# EAGLE board 13654-CSS811_CO2_TVOC_Breakout-panel.10 (EAGLE 7.5.0), part 1 of 3
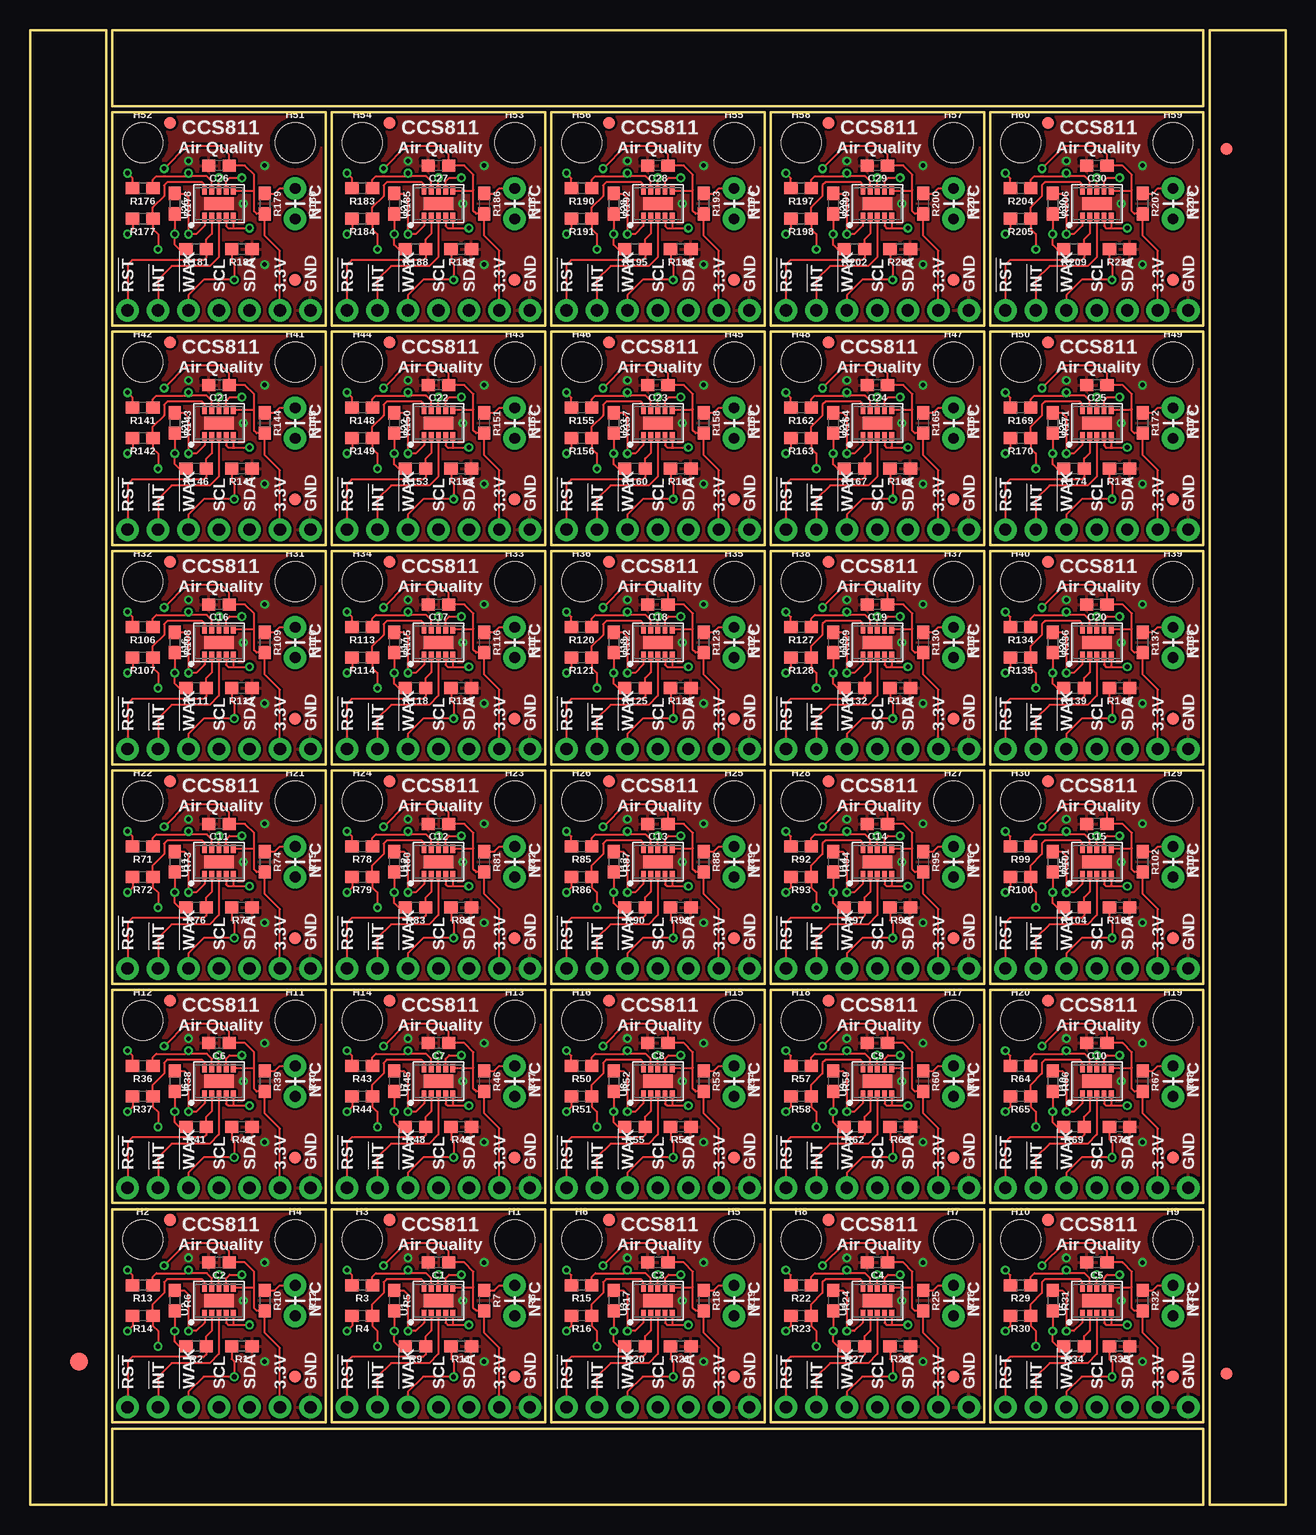
[diagram p0: board, top side]
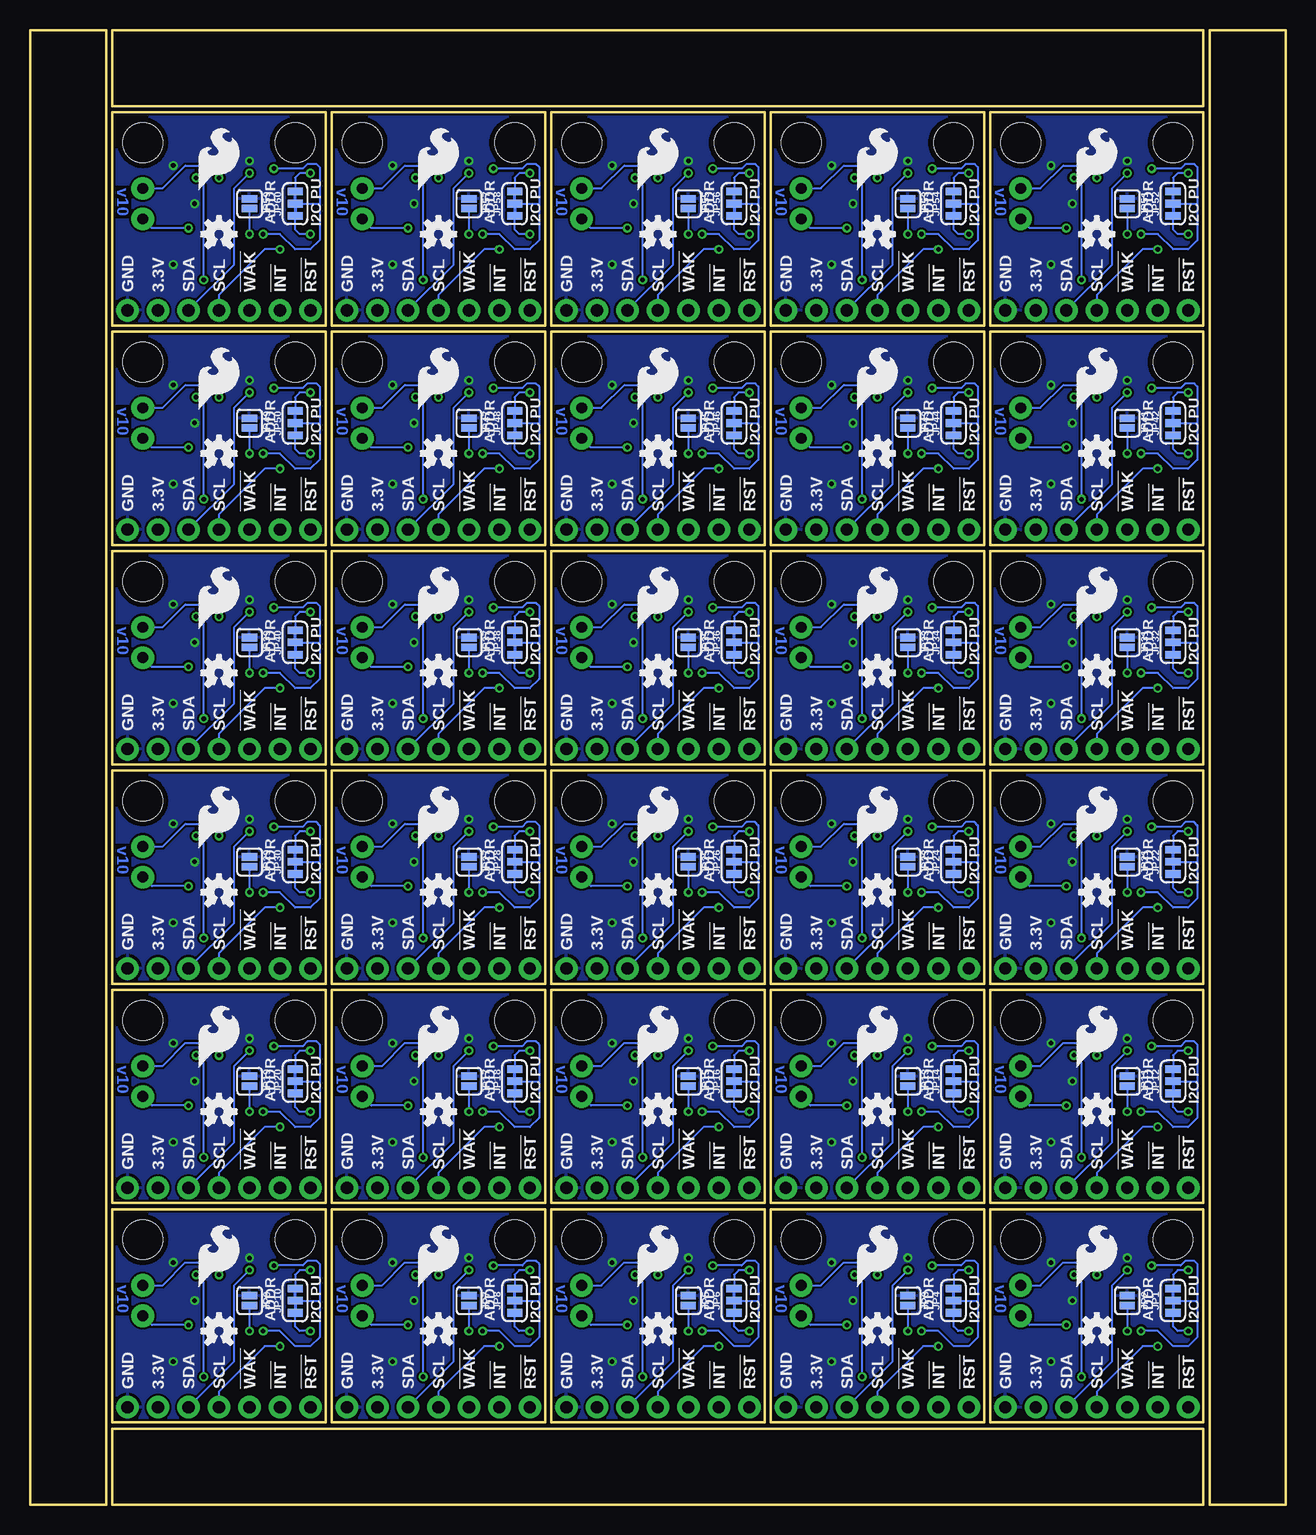
[diagram p1: board, bottom side, seen from below]

Size 104.65 x 122.94 mm. Coordinates in mm from the lower left corner, seen from the top.
Outline: 6.35,75.44 6.35,0 0,0 0,25.91
Outline: 0,23.37 0,122.94 6.35,122.94 6.35,72.9
Outline: 79.25,0 6.86,0 6.86,6.35 29.72,6.35
Outline: 27.18,6.35 97.79,6.35 97.79,0 76.71,0
Outline: 25.4,122.94 97.79,122.94 97.79,116.59 74.93,116.59
Outline: 77.47,116.59 6.86,116.59 6.86,122.94 27.94,122.94
Outline: 98.3,50.55 98.3,122.94 104.65,122.94 104.65,100.08
Outline: 104.65,102.62 104.65,0 98.3,0 98.3,53.09
Outline: 6.86,6.86 6.86,24.64 24.64,24.64 24.64,6.86 6.86,6.86
Outline: 25.15,6.86 25.15,24.64 42.93,24.64 42.93,6.86 25.15,6.86
Outline: 43.43,6.86 43.43,24.64 61.21,24.64 61.21,6.86 43.43,6.86
Outline: 61.72,6.86 61.72,24.64 79.5,24.64 79.5,6.86 61.72,6.86
Outline: 80.01,6.86 80.01,24.64 97.79,24.64 97.79,6.86 80.01,6.86
Outline: 6.86,25.15 6.86,42.93 24.64,42.93 24.64,25.15 6.86,25.15
Outline: 25.15,25.15 25.15,42.93 42.93,42.93 42.93,25.15 25.15,25.15
Outline: 43.43,25.15 43.43,42.93 61.21,42.93 61.21,25.15 43.43,25.15
Outline: 61.72,25.15 61.72,42.93 79.5,42.93 79.5,25.15 61.72,25.15
Outline: 80.01,25.15 80.01,42.93 97.79,42.93 97.79,25.15 80.01,25.15
Outline: 6.86,43.43 6.86,61.21 24.64,61.21 24.64,43.43 6.86,43.43
Outline: 25.15,43.43 25.15,61.21 42.93,61.21 42.93,43.43 25.15,43.43
Outline: 43.43,43.43 43.43,61.21 61.21,61.21 61.21,43.43 43.43,43.43
Outline: 61.72,43.43 61.72,61.21 79.5,61.21 79.5,43.43 61.72,43.43
Outline: 80.01,43.43 80.01,61.21 97.79,61.21 97.79,43.43 80.01,43.43
Outline: 6.86,61.72 6.86,79.5 24.64,79.5 24.64,61.72 6.86,61.72
Outline: 25.15,61.72 25.15,79.5 42.93,79.5 42.93,61.72 25.15,61.72
Outline: 43.43,61.72 43.43,79.5 61.21,79.5 61.21,61.72 43.43,61.72
Outline: 61.72,61.72 61.72,79.5 79.5,79.5 79.5,61.72 61.72,61.72
Outline: 80.01,61.72 80.01,79.5 97.79,79.5 97.79,61.72 80.01,61.72
Outline: 6.86,80.01 6.86,97.79 24.64,97.79 24.64,80.01 6.86,80.01
Outline: 25.15,80.01 25.15,97.79 42.93,97.79 42.93,80.01 25.15,80.01
Outline: 43.43,80.01 43.43,97.79 61.21,97.79 61.21,80.01 43.43,80.01
Outline: 61.72,80.01 61.72,97.79 79.5,97.79 79.5,80.01 61.72,80.01
Outline: 80.01,80.01 80.01,97.79 97.79,97.79 97.79,80.01 80.01,80.01
Outline: 6.86,98.3 6.86,116.08 24.64,116.08 24.64,98.3 6.86,98.3
Outline: 25.15,98.3 25.15,116.08 42.93,116.08 42.93,98.3 25.15,98.3
Outline: 43.43,98.3 43.43,116.08 61.21,116.08 61.21,98.3 43.43,98.3
Outline: 61.72,98.3 61.72,116.08 79.5,116.08 79.5,98.3 61.72,98.3
Outline: 80.01,98.3 80.01,116.08 97.79,116.08 97.79,98.3 80.01,98.3
Copper layers (1*16): Top 0.035mm / dielectric 1.5mm / Bottom 0.035mm
Design rules "SparkFun-2-layer-TIGHT": minimum track width 7mil, minimum drill 15mil, track to track 7mil, track to pad 7mil, pad to pad 7mil, via to via 7mil, smd to smd 7mil, copper to edge 7mil, drill to drill 7mil, minimum pad ring 7mil, minimum via ring 7mil, stop-mask expansion 4mil, vias tented up to drill 25mil, thermal gap 10mil

## Footprints (pad centres in the part's own frame; a part is rotated, then mirrored left to right if it is on the bottom)
0603 = smd 1.1 x 1: 1 -0.85,0; 2 0.85,0
FIDUCIAL-1.5X3 = smd 1.5 x 1.5: 1 0,0
FIDUCIAL-1X2 = smd 1 x 1: 1 0,0
STAND-OFF = hole 3.302: 0,0
1X04_NO_SILK = drill 1.016 pad 1.88: 1 0,0; 2 2.54,0; 3 5.08,0; 4 7.62,0
1X03_NO_SILK = drill 1.016 pad 1.88: 1 0,0; 2 2.54,0; 3 5.08,0
SMT-JUMPER_3_2-NC_TRACE_SILK = smd 0.635 x 1.27: 1 -1.016,0; 2 0,0; 3 1.016,0
SMT-JUMPER_2_NO_SILK = smd 0.635 x 1.27: 1 -0.406,0; 2 0.406,0
AXIAL-0.1 = drill 0.9 pad 1.88: P$1 -1.27,0; P$2 1.27,0
LGA10 = smd 0.7 x 0.4: 1 -1.1,1.2; 2 -1.1,0.6; 3 -1.1,0; 4 -1.1,-0.6; 5 -1.1,-1.2; 6 1.1,-1.2; 7 1.1,-0.6; 8 1.1,0; 9 1.1,0.6; 10 1.1,1.2 | smd 1.1 x 2.45: EP 0,0

## Placement (x,y rotation side)
C1  1.0uF  [0603]  34.04,20.19 180 top
C2  1.0uF  [0603]  15.75,20.19 180 top
C3  1.0uF  [0603]  52.32,20.19 180 top
C4  1.0uF  [0603]  70.61,20.19 180 top
C5  1.0uF  [0603]  88.9,20.19 180 top
C6  1.0uF  [0603]  15.75,38.48 180 top
C7  1.0uF  [0603]  34.04,38.48 180 top
C8  1.0uF  [0603]  52.32,38.48 180 top
C9  1.0uF  [0603]  70.61,38.48 180 top
C10  1.0uF  [0603]  88.9,38.48 180 top
C11  1.0uF  [0603]  15.75,56.77 180 top
C12  1.0uF  [0603]  34.04,56.77 180 top
C13  1.0uF  [0603]  52.32,56.77 180 top
C14  1.0uF  [0603]  70.61,56.77 180 top
C15  1.0uF  [0603]  88.9,56.77 180 top
C16  1.0uF  [0603]  15.75,75.06 180 top
C17  1.0uF  [0603]  34.04,75.06 180 top
C18  1.0uF  [0603]  52.32,75.06 180 top
C19  1.0uF  [0603]  70.61,75.06 180 top
C20  1.0uF  [0603]  88.9,75.06 180 top
C21  1.0uF  [0603]  15.75,93.34 180 top
C22  1.0uF  [0603]  34.04,93.34 180 top
C23  1.0uF  [0603]  52.32,93.34 180 top
C24  1.0uF  [0603]  70.61,93.34 180 top
C25  1.0uF  [0603]  88.9,93.34 180 top
C26  1.0uF  [0603]  15.75,111.63 180 top
C27  1.0uF  [0603]  34.04,111.63 180 top
C28  1.0uF  [0603]  52.32,111.63 180 top
C29  1.0uF  [0603]  70.61,111.63 180 top
C30  1.0uF  [0603]  88.9,111.63 180 top
E$1  [FIDUCIAL-1.5X3]  4.06,11.94 0 top
E$7  [FIDUCIAL-1X2]  99.69,113.03 180 top
E$8  [FIDUCIAL-1X2]  99.69,10.92 0 top
FD1  FIDUCIAL1X2  [FIDUCIAL-1X2]  11.68,23.75 0 top
FD2  FIDUCIAL1X2  [FIDUCIAL-1X2]  22.1,10.67 0 top
FD3  FIDUCIAL1X2  [FIDUCIAL-1X2]  29.97,23.75 0 top
FD4  FIDUCIAL1X2  [FIDUCIAL-1X2]  40.39,10.67 0 top
FD5  FIDUCIAL1X2  [FIDUCIAL-1X2]  48.26,23.75 0 top
FD6  FIDUCIAL1X2  [FIDUCIAL-1X2]  58.67,10.67 0 top
FD7  FIDUCIAL1X2  [FIDUCIAL-1X2]  66.55,23.75 0 top
FD8  FIDUCIAL1X2  [FIDUCIAL-1X2]  76.96,10.67 0 top
FD9  FIDUCIAL1X2  [FIDUCIAL-1X2]  84.84,23.75 0 top
FD10  FIDUCIAL1X2  [FIDUCIAL-1X2]  95.25,10.67 0 top
FD11  FIDUCIAL1X2  [FIDUCIAL-1X2]  11.68,42.04 0 top
FD12  FIDUCIAL1X2  [FIDUCIAL-1X2]  22.1,28.96 0 top
FD13  FIDUCIAL1X2  [FIDUCIAL-1X2]  29.97,42.04 0 top
FD14  FIDUCIAL1X2  [FIDUCIAL-1X2]  40.39,28.96 0 top
FD15  FIDUCIAL1X2  [FIDUCIAL-1X2]  48.26,42.04 0 top
FD16  FIDUCIAL1X2  [FIDUCIAL-1X2]  58.67,28.96 0 top
FD17  FIDUCIAL1X2  [FIDUCIAL-1X2]  66.55,42.04 0 top
FD18  FIDUCIAL1X2  [FIDUCIAL-1X2]  76.96,28.96 0 top
FD19  FIDUCIAL1X2  [FIDUCIAL-1X2]  84.84,42.04 0 top
FD20  FIDUCIAL1X2  [FIDUCIAL-1X2]  95.25,28.96 0 top
FD21  FIDUCIAL1X2  [FIDUCIAL-1X2]  11.68,60.33 0 top
FD22  FIDUCIAL1X2  [FIDUCIAL-1X2]  22.1,47.24 0 top
FD23  FIDUCIAL1X2  [FIDUCIAL-1X2]  29.97,60.33 0 top
FD24  FIDUCIAL1X2  [FIDUCIAL-1X2]  40.39,47.24 0 top
FD25  FIDUCIAL1X2  [FIDUCIAL-1X2]  48.26,60.33 0 top
FD26  FIDUCIAL1X2  [FIDUCIAL-1X2]  58.67,47.24 0 top
FD27  FIDUCIAL1X2  [FIDUCIAL-1X2]  66.55,60.33 0 top
FD28  FIDUCIAL1X2  [FIDUCIAL-1X2]  76.96,47.24 0 top
FD29  FIDUCIAL1X2  [FIDUCIAL-1X2]  84.84,60.33 0 top
FD30  FIDUCIAL1X2  [FIDUCIAL-1X2]  95.25,47.24 0 top
FD31  FIDUCIAL1X2  [FIDUCIAL-1X2]  11.68,78.61 0 top
FD32  FIDUCIAL1X2  [FIDUCIAL-1X2]  22.1,65.53 0 top
FD33  FIDUCIAL1X2  [FIDUCIAL-1X2]  29.97,78.61 0 top
FD34  FIDUCIAL1X2  [FIDUCIAL-1X2]  40.39,65.53 0 top
FD35  FIDUCIAL1X2  [FIDUCIAL-1X2]  48.26,78.61 0 top
FD36  FIDUCIAL1X2  [FIDUCIAL-1X2]  58.67,65.53 0 top
FD37  FIDUCIAL1X2  [FIDUCIAL-1X2]  66.55,78.61 0 top
FD38  FIDUCIAL1X2  [FIDUCIAL-1X2]  76.96,65.53 0 top
FD39  FIDUCIAL1X2  [FIDUCIAL-1X2]  84.84,78.61 0 top
FD40  FIDUCIAL1X2  [FIDUCIAL-1X2]  95.25,65.53 0 top
FD41  FIDUCIAL1X2  [FIDUCIAL-1X2]  11.68,96.9 0 top
FD42  FIDUCIAL1X2  [FIDUCIAL-1X2]  22.1,83.82 0 top
FD43  FIDUCIAL1X2  [FIDUCIAL-1X2]  29.97,96.9 0 top
FD44  FIDUCIAL1X2  [FIDUCIAL-1X2]  40.39,83.82 0 top
FD45  FIDUCIAL1X2  [FIDUCIAL-1X2]  48.26,96.9 0 top
FD46  FIDUCIAL1X2  [FIDUCIAL-1X2]  58.67,83.82 0 top
FD47  FIDUCIAL1X2  [FIDUCIAL-1X2]  66.55,96.9 0 top
FD48  FIDUCIAL1X2  [FIDUCIAL-1X2]  76.96,83.82 0 top
FD49  FIDUCIAL1X2  [FIDUCIAL-1X2]  84.84,96.9 0 top
FD50  FIDUCIAL1X2  [FIDUCIAL-1X2]  95.25,83.82 0 top
FD51  FIDUCIAL1X2  [FIDUCIAL-1X2]  11.68,115.19 0 top
FD52  FIDUCIAL1X2  [FIDUCIAL-1X2]  22.1,102.11 0 top
FD53  FIDUCIAL1X2  [FIDUCIAL-1X2]  29.97,115.19 0 top
FD54  FIDUCIAL1X2  [FIDUCIAL-1X2]  40.39,102.11 0 top
FD55  FIDUCIAL1X2  [FIDUCIAL-1X2]  48.26,115.19 0 top
FD56  FIDUCIAL1X2  [FIDUCIAL-1X2]  58.67,102.11 0 top
FD57  FIDUCIAL1X2  [FIDUCIAL-1X2]  66.55,115.19 0 top
FD58  FIDUCIAL1X2  [FIDUCIAL-1X2]  76.96,102.11 0 top
FD59  FIDUCIAL1X2  [FIDUCIAL-1X2]  84.84,115.19 0 top
FD60  FIDUCIAL1X2  [FIDUCIAL-1X2]  95.25,102.11 0 top
H1  STAND-OFF  [STAND-OFF]  40.39,22.1 0 top
H2  STAND-OFF  [STAND-OFF]  9.4,22.1 0 top
H3  STAND-OFF  [STAND-OFF]  27.69,22.1 0 top
H4  STAND-OFF  [STAND-OFF]  22.1,22.1 0 top
H5  STAND-OFF  [STAND-OFF]  58.67,22.1 0 top
H6  STAND-OFF  [STAND-OFF]  45.97,22.1 0 top
H7  STAND-OFF  [STAND-OFF]  76.96,22.1 0 top
H8  STAND-OFF  [STAND-OFF]  64.26,22.1 0 top
H9  STAND-OFF  [STAND-OFF]  95.25,22.1 0 top
H10  STAND-OFF  [STAND-OFF]  82.55,22.1 0 top
H11  STAND-OFF  [STAND-OFF]  22.1,40.39 0 top
H12  STAND-OFF  [STAND-OFF]  9.4,40.39 0 top
H13  STAND-OFF  [STAND-OFF]  40.39,40.39 0 top
H14  STAND-OFF  [STAND-OFF]  27.69,40.39 0 top
H15  STAND-OFF  [STAND-OFF]  58.67,40.39 0 top
H16  STAND-OFF  [STAND-OFF]  45.97,40.39 0 top
H17  STAND-OFF  [STAND-OFF]  76.96,40.39 0 top
H18  STAND-OFF  [STAND-OFF]  64.26,40.39 0 top
H19  STAND-OFF  [STAND-OFF]  95.25,40.39 0 top
H20  STAND-OFF  [STAND-OFF]  82.55,40.39 0 top
H21  STAND-OFF  [STAND-OFF]  22.1,58.67 0 top
H22  STAND-OFF  [STAND-OFF]  9.4,58.67 0 top
H23  STAND-OFF  [STAND-OFF]  40.39,58.67 0 top
H24  STAND-OFF  [STAND-OFF]  27.69,58.67 0 top
H25  STAND-OFF  [STAND-OFF]  58.67,58.67 0 top
H26  STAND-OFF  [STAND-OFF]  45.97,58.67 0 top
H27  STAND-OFF  [STAND-OFF]  76.96,58.67 0 top
H28  STAND-OFF  [STAND-OFF]  64.26,58.67 0 top
H29  STAND-OFF  [STAND-OFF]  95.25,58.67 0 top
H30  STAND-OFF  [STAND-OFF]  82.55,58.67 0 top
H31  STAND-OFF  [STAND-OFF]  22.1,76.96 0 top
H32  STAND-OFF  [STAND-OFF]  9.4,76.96 0 top
H33  STAND-OFF  [STAND-OFF]  40.39,76.96 0 top
H34  STAND-OFF  [STAND-OFF]  27.69,76.96 0 top
H35  STAND-OFF  [STAND-OFF]  58.67,76.96 0 top
H36  STAND-OFF  [STAND-OFF]  45.97,76.96 0 top
H37  STAND-OFF  [STAND-OFF]  76.96,76.96 0 top
H38  STAND-OFF  [STAND-OFF]  64.26,76.96 0 top
H39  STAND-OFF  [STAND-OFF]  95.25,76.96 0 top
H40  STAND-OFF  [STAND-OFF]  82.55,76.96 0 top
H41  STAND-OFF  [STAND-OFF]  22.1,95.25 0 top
H42  STAND-OFF  [STAND-OFF]  9.4,95.25 0 top
H43  STAND-OFF  [STAND-OFF]  40.39,95.25 0 top
H44  STAND-OFF  [STAND-OFF]  27.69,95.25 0 top
H45  STAND-OFF  [STAND-OFF]  58.67,95.25 0 top
H46  STAND-OFF  [STAND-OFF]  45.97,95.25 0 top
H47  STAND-OFF  [STAND-OFF]  76.96,95.25 0 top
H48  STAND-OFF  [STAND-OFF]  64.26,95.25 0 top
H49  STAND-OFF  [STAND-OFF]  95.25,95.25 0 top
H50  STAND-OFF  [STAND-OFF]  82.55,95.25 0 top
H51  STAND-OFF  [STAND-OFF]  22.1,113.54 0 top
H52  STAND-OFF  [STAND-OFF]  9.4,113.54 0 top
H53  STAND-OFF  [STAND-OFF]  40.39,113.54 0 top
H54  STAND-OFF  [STAND-OFF]  27.69,113.54 0 top
H55  STAND-OFF  [STAND-OFF]  58.67,113.54 0 top
H56  STAND-OFF  [STAND-OFF]  45.97,113.54 0 top
H57  STAND-OFF  [STAND-OFF]  76.96,113.54 0 top
H58  STAND-OFF  [STAND-OFF]  64.26,113.54 0 top
H59  STAND-OFF  [STAND-OFF]  95.25,113.54 0 top
H60  STAND-OFF  [STAND-OFF]  82.55,113.54 0 top
J1  [1X04_NO_SILK]  41.66,8.13 180 top
J2  [1X03_NO_SILK]  13.21,8.13 180 top
J3  [1X03_NO_SILK]  31.5,8.13 180 top
J4  [1X04_NO_SILK]  59.94,8.13 180 top
J5  [1X03_NO_SILK]  49.78,8.13 180 top
J6  [1X04_NO_SILK]  78.23,8.13 180 top
J7  [1X03_NO_SILK]  68.07,8.13 180 top
J8  [1X04_NO_SILK]  23.37,8.13 180 top
J9  [1X04_NO_SILK]  96.52,8.13 180 top
J10  [1X03_NO_SILK]  86.36,8.13 180 top
J11  [1X04_NO_SILK]  23.37,26.42 180 top
J12  [1X03_NO_SILK]  13.21,26.42 180 top
J13  [1X04_NO_SILK]  41.66,26.42 180 top
J14  [1X03_NO_SILK]  31.5,26.42 180 top
J15  [1X04_NO_SILK]  59.94,26.42 180 top
J16  [1X03_NO_SILK]  49.78,26.42 180 top
J17  [1X04_NO_SILK]  78.23,26.42 180 top
J18  [1X03_NO_SILK]  68.07,26.42 180 top
J19  [1X04_NO_SILK]  96.52,26.42 180 top
J20  [1X03_NO_SILK]  86.36,26.42 180 top
J21  [1X04_NO_SILK]  23.37,44.7 180 top
J22  [1X03_NO_SILK]  13.21,44.7 180 top
J23  [1X04_NO_SILK]  41.66,44.7 180 top
J24  [1X03_NO_SILK]  31.5,44.7 180 top
J25  [1X04_NO_SILK]  59.94,44.7 180 top
J26  [1X03_NO_SILK]  49.78,44.7 180 top
J27  [1X04_NO_SILK]  78.23,44.7 180 top
J28  [1X03_NO_SILK]  68.07,44.7 180 top
J29  [1X04_NO_SILK]  96.52,44.7 180 top
J30  [1X03_NO_SILK]  86.36,44.7 180 top
J31  [1X04_NO_SILK]  23.37,62.99 180 top
J32  [1X03_NO_SILK]  13.21,62.99 180 top
J33  [1X04_NO_SILK]  41.66,62.99 180 top
J34  [1X03_NO_SILK]  31.5,62.99 180 top
J35  [1X04_NO_SILK]  59.94,62.99 180 top
J36  [1X03_NO_SILK]  49.78,62.99 180 top
J37  [1X04_NO_SILK]  78.23,62.99 180 top
J38  [1X03_NO_SILK]  68.07,62.99 180 top
J39  [1X04_NO_SILK]  96.52,62.99 180 top
J40  [1X03_NO_SILK]  86.36,62.99 180 top
J41  [1X04_NO_SILK]  23.37,81.28 180 top
J42  [1X03_NO_SILK]  13.21,81.28 180 top
J43  [1X04_NO_SILK]  41.66,81.28 180 top
J44  [1X03_NO_SILK]  31.5,81.28 180 top
J45  [1X04_NO_SILK]  59.94,81.28 180 top
J46  [1X03_NO_SILK]  49.78,81.28 180 top
J47  [1X04_NO_SILK]  78.23,81.28 180 top
J48  [1X03_NO_SILK]  68.07,81.28 180 top
J49  [1X04_NO_SILK]  96.52,81.28 180 top
J50  [1X03_NO_SILK]  86.36,81.28 180 top
J51  [1X04_NO_SILK]  23.37,99.57 180 top
J52  [1X03_NO_SILK]  13.21,99.57 180 top
J53  [1X04_NO_SILK]  41.66,99.57 180 top
J54  [1X03_NO_SILK]  31.5,99.57 180 top
J55  [1X04_NO_SILK]  59.94,99.57 180 top
J56  [1X03_NO_SILK]  49.78,99.57 180 top
J57  [1X04_NO_SILK]  78.23,99.57 180 top
J58  [1X03_NO_SILK]  68.07,99.57 180 top
J59  [1X04_NO_SILK]  96.52,99.57 180 top
J60  [1X03_NO_SILK]  86.36,99.57 180 top
JP1  [SMT-JUMPER_3_2-NC_TRACE_SILK]  9.4,17.02 90 bottom
JP2  [SMT-JUMPER_2_NO_SILK]  13.21,17.02 270 bottom
JP3  [SMT-JUMPER_2_NO_SILK]  31.5,17.02 270 bottom
JP4  [SMT-JUMPER_3_2-NC_TRACE_SILK]  27.69,17.02 90 bottom
JP5  [SMT-JUMPER_2_NO_SILK]  49.78,17.02 270 bottom
JP6  [SMT-JUMPER_3_2-NC_TRACE_SILK]  45.97,17.02 90 bottom
JP7  [SMT-JUMPER_2_NO_SILK]  68.07,17.02 270 bottom
JP8  [SMT-JUMPER_3_2-NC_TRACE_SILK]  64.26,17.02 90 bottom
JP9  [SMT-JUMPER_2_NO_SILK]  86.36,17.02 270 bottom
JP10  [SMT-JUMPER_3_2-NC_TRACE_SILK]  82.55,17.02 90 bottom
JP11  [SMT-JUMPER_2_NO_SILK]  13.21,35.31 270 bottom
JP12  [SMT-JUMPER_3_2-NC_TRACE_SILK]  9.4,35.31 90 bottom
JP13  [SMT-JUMPER_2_NO_SILK]  31.5,35.31 270 bottom
JP14  [SMT-JUMPER_3_2-NC_TRACE_SILK]  27.69,35.31 90 bottom
JP15  [SMT-JUMPER_2_NO_SILK]  49.78,35.31 270 bottom
JP16  [SMT-JUMPER_3_2-NC_TRACE_SILK]  45.97,35.31 90 bottom
JP17  [SMT-JUMPER_2_NO_SILK]  68.07,35.31 270 bottom
JP18  [SMT-JUMPER_3_2-NC_TRACE_SILK]  64.26,35.31 90 bottom
JP19  [SMT-JUMPER_2_NO_SILK]  86.36,35.31 270 bottom
JP20  [SMT-JUMPER_3_2-NC_TRACE_SILK]  82.55,35.31 90 bottom
JP21  [SMT-JUMPER_2_NO_SILK]  13.21,53.59 270 bottom
JP22  [SMT-JUMPER_3_2-NC_TRACE_SILK]  9.4,53.59 90 bottom
JP23  [SMT-JUMPER_2_NO_SILK]  31.5,53.59 270 bottom
JP24  [SMT-JUMPER_3_2-NC_TRACE_SILK]  27.69,53.59 90 bottom
JP25  [SMT-JUMPER_2_NO_SILK]  49.78,53.59 270 bottom
JP26  [SMT-JUMPER_3_2-NC_TRACE_SILK]  45.97,53.59 90 bottom
JP27  [SMT-JUMPER_2_NO_SILK]  68.07,53.59 270 bottom
JP28  [SMT-JUMPER_3_2-NC_TRACE_SILK]  64.26,53.59 90 bottom
JP29  [SMT-JUMPER_2_NO_SILK]  86.36,53.59 270 bottom
JP30  [SMT-JUMPER_3_2-NC_TRACE_SILK]  82.55,53.59 90 bottom
JP31  [SMT-JUMPER_2_NO_SILK]  13.21,71.88 270 bottom
JP32  [SMT-JUMPER_3_2-NC_TRACE_SILK]  9.4,71.88 90 bottom
JP33  [SMT-JUMPER_2_NO_SILK]  31.5,71.88 270 bottom
JP34  [SMT-JUMPER_3_2-NC_TRACE_SILK]  27.69,71.88 90 bottom
JP35  [SMT-JUMPER_2_NO_SILK]  49.78,71.88 270 bottom
JP36  [SMT-JUMPER_3_2-NC_TRACE_SILK]  45.97,71.88 90 bottom
JP37  [SMT-JUMPER_2_NO_SILK]  68.07,71.88 270 bottom
JP38  [SMT-JUMPER_3_2-NC_TRACE_SILK]  64.26,71.88 90 bottom
JP39  [SMT-JUMPER_2_NO_SILK]  86.36,71.88 270 bottom
JP40  [SMT-JUMPER_3_2-NC_TRACE_SILK]  82.55,71.88 90 bottom
JP41  [SMT-JUMPER_2_NO_SILK]  13.21,90.17 270 bottom
JP42  [SMT-JUMPER_3_2-NC_TRACE_SILK]  9.4,90.17 90 bottom
JP43  [SMT-JUMPER_2_NO_SILK]  31.5,90.17 270 bottom
JP44  [SMT-JUMPER_3_2-NC_TRACE_SILK]  27.69,90.17 90 bottom
JP45  [SMT-JUMPER_2_NO_SILK]  49.78,90.17 270 bottom
JP46  [SMT-JUMPER_3_2-NC_TRACE_SILK]  45.97,90.17 90 bottom
JP47  [SMT-JUMPER_2_NO_SILK]  68.07,90.17 270 bottom
JP48  [SMT-JUMPER_3_2-NC_TRACE_SILK]  64.26,90.17 90 bottom
JP49  [SMT-JUMPER_2_NO_SILK]  86.36,90.17 270 bottom
JP50  [SMT-JUMPER_3_2-NC_TRACE_SILK]  82.55,90.17 90 bottom
JP51  [SMT-JUMPER_2_NO_SILK]  13.21,108.46 270 bottom
JP52  [SMT-JUMPER_3_2-NC_TRACE_SILK]  9.4,108.46 90 bottom
JP53  [SMT-JUMPER_2_NO_SILK]  31.5,108.46 270 bottom
JP54  [SMT-JUMPER_3_2-NC_TRACE_SILK]  27.69,108.46 90 bottom
JP55  [SMT-JUMPER_2_NO_SILK]  49.78,108.46 270 bottom
JP56  [SMT-JUMPER_3_2-NC_TRACE_SILK]  45.97,108.46 90 bottom
JP57  [SMT-JUMPER_2_NO_SILK]  68.07,108.46 270 bottom
JP58  [SMT-JUMPER_3_2-NC_TRACE_SILK]  64.26,108.46 90 bottom
JP59  [SMT-JUMPER_2_NO_SILK]  86.36,108.46 270 bottom
JP60  [SMT-JUMPER_3_2-NC_TRACE_SILK]  82.55,108.46 90 bottom
LOGO1  SFE_LOGO_FLAME.2_INCH  [SFE_LOGO_FLAME_.2]  17.78,17.91 0 bottom
LOGO2  OSHW-LOGOS  [OSHW-LOGO-S]  34.04,14.48 0 bottom
LOGO3  SFE_LOGO_FLAME.2_INCH  [SFE_LOGO_FLAME_.2]  36.07,17.91 0 bottom
LOGO4  OSHW-LOGOS  [OSHW-LOGO-S]  15.75,14.48 0 bottom
LOGO5  OSHW-LOGOS  [OSHW-LOGO-S]  52.32,14.48 0 bottom
LOGO6  SFE_LOGO_FLAME.2_INCH  [SFE_LOGO_FLAME_.2]  54.36,17.91 0 bottom
LOGO7  OSHW-LOGOS  [OSHW-LOGO-S]  70.61,14.48 0 bottom
LOGO8  SFE_LOGO_FLAME.2_INCH  [SFE_LOGO_FLAME_.2]  72.64,17.91 0 bottom
LOGO9  OSHW-LOGOS  [OSHW-LOGO-S]  88.9,14.48 0 bottom
LOGO10  SFE_LOGO_FLAME.2_INCH  [SFE_LOGO_FLAME_.2]  90.93,17.91 0 bottom
LOGO11  OSHW-LOGOS  [OSHW-LOGO-S]  15.75,32.77 0 bottom
LOGO12  SFE_LOGO_FLAME.2_INCH  [SFE_LOGO_FLAME_.2]  17.78,36.2 0 bottom
LOGO13  OSHW-LOGOS  [OSHW-LOGO-S]  34.04,32.77 0 bottom
LOGO14  SFE_LOGO_FLAME.2_INCH  [SFE_LOGO_FLAME_.2]  36.07,36.2 0 bottom
LOGO15  OSHW-LOGOS  [OSHW-LOGO-S]  52.32,32.77 0 bottom
LOGO16  SFE_LOGO_FLAME.2_INCH  [SFE_LOGO_FLAME_.2]  54.36,36.2 0 bottom
LOGO17  OSHW-LOGOS  [OSHW-LOGO-S]  70.61,32.77 0 bottom
LOGO18  SFE_LOGO_FLAME.2_INCH  [SFE_LOGO_FLAME_.2]  72.64,36.2 0 bottom
LOGO19  OSHW-LOGOS  [OSHW-LOGO-S]  88.9,32.77 0 bottom
LOGO20  SFE_LOGO_FLAME.2_INCH  [SFE_LOGO_FLAME_.2]  90.93,36.2 0 bottom
LOGO21  OSHW-LOGOS  [OSHW-LOGO-S]  15.75,51.05 0 bottom
LOGO22  SFE_LOGO_FLAME.2_INCH  [SFE_LOGO_FLAME_.2]  17.78,54.48 0 bottom
LOGO23  OSHW-LOGOS  [OSHW-LOGO-S]  34.04,51.05 0 bottom
LOGO24  SFE_LOGO_FLAME.2_INCH  [SFE_LOGO_FLAME_.2]  36.07,54.48 0 bottom
LOGO25  OSHW-LOGOS  [OSHW-LOGO-S]  52.32,51.05 0 bottom
LOGO26  SFE_LOGO_FLAME.2_INCH  [SFE_LOGO_FLAME_.2]  54.36,54.48 0 bottom
LOGO27  OSHW-LOGOS  [OSHW-LOGO-S]  70.61,51.05 0 bottom
LOGO28  SFE_LOGO_FLAME.2_INCH  [SFE_LOGO_FLAME_.2]  72.64,54.48 0 bottom
LOGO29  OSHW-LOGOS  [OSHW-LOGO-S]  88.9,51.05 0 bottom
LOGO30  SFE_LOGO_FLAME.2_INCH  [SFE_LOGO_FLAME_.2]  90.93,54.48 0 bottom
LOGO31  OSHW-LOGOS  [OSHW-LOGO-S]  15.75,69.34 0 bottom
LOGO32  SFE_LOGO_FLAME.2_INCH  [SFE_LOGO_FLAME_.2]  17.78,72.77 0 bottom
LOGO33  OSHW-LOGOS  [OSHW-LOGO-S]  34.04,69.34 0 bottom
LOGO34  SFE_LOGO_FLAME.2_INCH  [SFE_LOGO_FLAME_.2]  36.07,72.77 0 bottom
LOGO35  OSHW-LOGOS  [OSHW-LOGO-S]  52.32,69.34 0 bottom
LOGO36  SFE_LOGO_FLAME.2_INCH  [SFE_LOGO_FLAME_.2]  54.36,72.77 0 bottom
LOGO37  OSHW-LOGOS  [OSHW-LOGO-S]  70.61,69.34 0 bottom
LOGO38  SFE_LOGO_FLAME.2_INCH  [SFE_LOGO_FLAME_.2]  72.64,72.77 0 bottom
LOGO39  OSHW-LOGOS  [OSHW-LOGO-S]  88.9,69.34 0 bottom
LOGO40  SFE_LOGO_FLAME.2_INCH  [SFE_LOGO_FLAME_.2]  90.93,72.77 0 bottom
LOGO41  OSHW-LOGOS  [OSHW-LOGO-S]  15.75,87.63 0 bottom
LOGO42  SFE_LOGO_FLAME.2_INCH  [SFE_LOGO_FLAME_.2]  17.78,91.06 0 bottom
LOGO43  OSHW-LOGOS  [OSHW-LOGO-S]  34.04,87.63 0 bottom
LOGO44  SFE_LOGO_FLAME.2_INCH  [SFE_LOGO_FLAME_.2]  36.07,91.06 0 bottom
LOGO45  OSHW-LOGOS  [OSHW-LOGO-S]  52.32,87.63 0 bottom
LOGO46  SFE_LOGO_FLAME.2_INCH  [SFE_LOGO_FLAME_.2]  54.36,91.06 0 bottom
LOGO47  OSHW-LOGOS  [OSHW-LOGO-S]  70.61,87.63 0 bottom
LOGO48  SFE_LOGO_FLAME.2_INCH  [SFE_LOGO_FLAME_.2]  72.64,91.06 0 bottom
LOGO49  OSHW-LOGOS  [OSHW-LOGO-S]  88.9,87.63 0 bottom
LOGO50  SFE_LOGO_FLAME.2_INCH  [SFE_LOGO_FLAME_.2]  90.93,91.06 0 bottom
LOGO51  OSHW-LOGOS  [OSHW-LOGO-S]  15.75,105.92 0 bottom
LOGO52  SFE_LOGO_FLAME.2_INCH  [SFE_LOGO_FLAME_.2]  17.78,109.35 0 bottom
LOGO53  OSHW-LOGOS  [OSHW-LOGO-S]  34.04,105.92 0 bottom
LOGO54  SFE_LOGO_FLAME.2_INCH  [SFE_LOGO_FLAME_.2]  36.07,109.35 0 bottom
LOGO55  OSHW-LOGOS  [OSHW-LOGO-S]  52.32,105.92 0 bottom
LOGO56  SFE_LOGO_FLAME.2_INCH  [SFE_LOGO_FLAME_.2]  54.36,109.35 0 bottom
LOGO57  OSHW-LOGOS  [OSHW-LOGO-S]  70.61,105.92 0 bottom
LOGO58  SFE_LOGO_FLAME.2_INCH  [SFE_LOGO_FLAME_.2]  72.64,109.35 0 bottom
LOGO59  OSHW-LOGOS  [OSHW-LOGO-S]  88.9,105.92 0 bottom
LOGO60  SFE_LOGO_FLAME.2_INCH  [SFE_LOGO_FLAME_.2]  90.93,109.35 0 bottom
R1  100k  [0603]  17.65,13.21 180 top
R2  4.7k  [0603]  13.84,13.21 180 top
R3  4.7k  [0603]  27.69,18.29 180 top
R4  4.7k  [0603]  27.69,15.75 180 top
R5  100k  [0603]  30.35,17.02 270 top
R6  100k  [0603]  12.06,17.02 270 top
R7  10k  [0603]  37.85,17.02 270 top
R8  10k  [AXIAL-0.1]  40.39,17.02 270 top
R9  4.7k  [0603]  32.13,13.21 180 top
R10  10k  [0603]  19.56,17.02 270 top
R11  100k  [0603]  35.94,13.21 180 top
R12  10k  [AXIAL-0.1]  22.1,17.02 270 top
R13  4.7k  [0603]  9.4,18.29 180 top
R14  4.7k  [0603]  9.4,15.75 180 top
R15  4.7k  [0603]  45.97,18.29 180 top
R16  4.7k  [0603]  45.97,15.75 180 top
R17  100k  [0603]  48.64,17.02 270 top
R18  10k  [0603]  56.13,17.02 270 top
R19  10k  [AXIAL-0.1]  58.67,17.02 270 top
R20  4.7k  [0603]  50.42,13.21 180 top
R21  100k  [0603]  54.23,13.21 180 top
R22  4.7k  [0603]  64.26,18.29 180 top
R23  4.7k  [0603]  64.26,15.75 180 top
R24  100k  [0603]  66.93,17.02 270 top
R25  10k  [0603]  74.42,17.02 270 top
R26  10k  [AXIAL-0.1]  76.96,17.02 270 top
R27  4.7k  [0603]  68.71,13.21 180 top
R28  100k  [0603]  72.52,13.21 180 top
R29  4.7k  [0603]  82.55,18.29 180 top
R30  4.7k  [0603]  82.55,15.75 180 top
R31  100k  [0603]  85.22,17.02 270 top
R32  10k  [0603]  92.71,17.02 270 top
R33  10k  [AXIAL-0.1]  95.25,17.02 270 top
R34  4.7k  [0603]  87,13.21 180 top
R35  100k  [0603]  90.81,13.21 180 top
R36  4.7k  [0603]  9.4,36.58 180 top
R37  4.7k  [0603]  9.4,34.04 180 top
R38  100k  [0603]  12.06,35.31 270 top
R39  10k  [0603]  19.56,35.31 270 top
R40  10k  [AXIAL-0.1]  22.1,35.31 270 top
R41  4.7k  [0603]  13.84,31.5 180 top
R42  100k  [0603]  17.65,31.5 180 top
R43  4.7k  [0603]  27.69,36.58 180 top
R44  4.7k  [0603]  27.69,34.04 180 top
R45  100k  [0603]  30.35,35.31 270 top
R46  10k  [0603]  37.85,35.31 270 top
R47  10k  [AXIAL-0.1]  40.39,35.31 270 top
R48  4.7k  [0603]  32.13,31.5 180 top
R49  100k  [0603]  35.94,31.5 180 top
R50  4.7k  [0603]  45.97,36.58 180 top
R51  4.7k  [0603]  45.97,34.04 180 top
R52  100k  [0603]  48.64,35.31 270 top
R53  10k  [0603]  56.13,35.31 270 top
R54  10k  [AXIAL-0.1]  58.67,35.31 270 top
R55  4.7k  [0603]  50.42,31.5 180 top
R56  100k  [0603]  54.23,31.5 180 top
R57  4.7k  [0603]  64.26,36.58 180 top
R58  4.7k  [0603]  64.26,34.04 180 top
R59  100k  [0603]  66.93,35.31 270 top
R60  10k  [0603]  74.42,35.31 270 top
R61  10k  [AXIAL-0.1]  76.96,35.31 270 top
R62  4.7k  [0603]  68.71,31.5 180 top
R63  100k  [0603]  72.52,31.5 180 top
R64  4.7k  [0603]  82.55,36.58 180 top
R65  4.7k  [0603]  82.55,34.04 180 top
R66  100k  [0603]  85.22,35.31 270 top
R67  10k  [0603]  92.71,35.31 270 top
R68  10k  [AXIAL-0.1]  95.25,35.31 270 top
R69  4.7k  [0603]  87,31.5 180 top
R70  100k  [0603]  90.81,31.5 180 top
R71  4.7k  [0603]  9.4,54.86 180 top
R72  4.7k  [0603]  9.4,52.32 180 top
R73  100k  [0603]  12.06,53.59 270 top
R74  10k  [0603]  19.56,53.59 270 top
R75  10k  [AXIAL-0.1]  22.1,53.59 270 top
R76  4.7k  [0603]  13.84,49.78 180 top
R77  100k  [0603]  17.65,49.78 180 top
R78  4.7k  [0603]  27.69,54.86 180 top
R79  4.7k  [0603]  27.69,52.32 180 top
R80  100k  [0603]  30.35,53.59 270 top
R81  10k  [0603]  37.85,53.59 270 top
R82  10k  [AXIAL-0.1]  40.39,53.59 270 top
R83  4.7k  [0603]  32.13,49.78 180 top
R84  100k  [0603]  35.94,49.78 180 top
R85  4.7k  [0603]  45.97,54.86 180 top
R86  4.7k  [0603]  45.97,52.32 180 top
R87  100k  [0603]  48.64,53.59 270 top
R88  10k  [0603]  56.13,53.59 270 top
R89  10k  [AXIAL-0.1]  58.67,53.59 270 top
R90  4.7k  [0603]  50.42,49.78 180 top
R91  100k  [0603]  54.23,49.78 180 top
R92  4.7k  [0603]  64.26,54.86 180 top
R93  4.7k  [0603]  64.26,52.32 180 top
R94  100k  [0603]  66.93,53.59 270 top
R95  10k  [0603]  74.42,53.59 270 top
R96  10k  [AXIAL-0.1]  76.96,53.59 270 top
R97  4.7k  [0603]  68.71,49.78 180 top
R98  100k  [0603]  72.52,49.78 180 top
R99  4.7k  [0603]  82.55,54.86 180 top
R100  4.7k  [0603]  82.55,52.32 180 top
R101  100k  [0603]  85.22,53.59 270 top
R102  10k  [0603]  92.71,53.59 270 top
R103  10k  [AXIAL-0.1]  95.25,53.59 270 top
R104  4.7k  [0603]  87,49.78 180 top
R105  100k  [0603]  90.81,49.78 180 top
R106  4.7k  [0603]  9.4,73.15 180 top
R107  4.7k  [0603]  9.4,70.61 180 top
R108  100k  [0603]  12.06,71.88 270 top
R109  10k  [0603]  19.56,71.88 270 top
R110  10k  [AXIAL-0.1]  22.1,71.88 270 top
R111  4.7k  [0603]  13.84,68.07 180 top
R112  100k  [0603]  17.65,68.07 180 top
R113  4.7k  [0603]  27.69,73.15 180 top
R114  4.7k  [0603]  27.69,70.61 180 top
R115  100k  [0603]  30.35,71.88 270 top
R116  10k  [0603]  37.85,71.88 270 top
R117  10k  [AXIAL-0.1]  40.39,71.88 270 top
R118  4.7k  [0603]  32.13,68.07 180 top
R119  100k  [0603]  35.94,68.07 180 top
R120  4.7k  [0603]  45.97,73.15 180 top
R121  4.7k  [0603]  45.97,70.61 180 top
R122  100k  [0603]  48.64,71.88 270 top
R123  10k  [0603]  56.13,71.88 270 top
R124  10k  [AXIAL-0.1]  58.67,71.88 270 top
R125  4.7k  [0603]  50.42,68.07 180 top
R126  100k  [0603]  54.23,68.07 180 top
R127  4.7k  [0603]  64.26,73.15 180 top
R128  4.7k  [0603]  64.26,70.61 180 top
R129  100k  [0603]  66.93,71.88 270 top
R130  10k  [0603]  74.42,71.88 270 top
R131  10k  [AXIAL-0.1]  76.96,71.88 270 top
R132  4.7k  [0603]  68.71,68.07 180 top
R133  100k  [0603]  72.52,68.07 180 top
R134  4.7k  [0603]  82.55,73.15 180 top
R135  4.7k  [0603]  82.55,70.61 180 top
R136  100k  [0603]  85.22,71.88 270 top
R137  10k  [0603]  92.71,71.88 270 top
R138  10k  [AXIAL-0.1]  95.25,71.88 270 top
R139  4.7k  [0603]  87,68.07 180 top
R140  100k  [0603]  90.81,68.07 180 top
R141  4.7k  [0603]  9.4,91.44 180 top
R142  4.7k  [0603]  9.4,88.9 180 top
R143  100k  [0603]  12.06,90.17 270 top
R144  10k  [0603]  19.56,90.17 270 top
R145  10k  [AXIAL-0.1]  22.1,90.17 270 top
R146  4.7k  [0603]  13.84,86.36 180 top
R147  100k  [0603]  17.65,86.36 180 top
R148  4.7k  [0603]  27.69,91.44 180 top
R149  4.7k  [0603]  27.69,88.9 180 top
R150  100k  [0603]  30.35,90.17 270 top
R151  10k  [0603]  37.85,90.17 270 top
R152  10k  [AXIAL-0.1]  40.39,90.17 270 top
R153  4.7k  [0603]  32.13,86.36 180 top
R154  100k  [0603]  35.94,86.36 180 top
R155  4.7k  [0603]  45.97,91.44 180 top
R156  4.7k  [0603]  45.97,88.9 180 top
R157  100k  [0603]  48.64,90.17 270 top
R158  10k  [0603]  56.13,90.17 270 top
R159  10k  [AXIAL-0.1]  58.67,90.17 270 top
R160  4.7k  [0603]  50.42,86.36 180 top
R161  100k  [0603]  54.23,86.36 180 top
R162  4.7k  [0603]  64.26,91.44 180 top
R163  4.7k  [0603]  64.26,88.9 180 top
R164  100k  [0603]  66.93,90.17 270 top
R165  10k  [0603]  74.42,90.17 270 top
R166  10k  [AXIAL-0.1]  76.96,90.17 270 top
R167  4.7k  [0603]  68.71,86.36 180 top
R168  100k  [0603]  72.52,86.36 180 top
R169  4.7k  [0603]  82.55,91.44 180 top
R170  4.7k  [0603]  82.55,88.9 180 top
R171  100k  [0603]  85.22,90.17 270 top
R172  10k  [0603]  92.71,90.17 270 top
R173  10k  [AXIAL-0.1]  95.25,90.17 270 top
R174  4.7k  [0603]  87,86.36 180 top
R175  100k  [0603]  90.81,86.36 180 top
R176  4.7k  [0603]  9.4,109.73 180 top
R177  4.7k  [0603]  9.4,107.19 180 top
R178  100k  [0603]  12.06,108.46 270 top
R179  10k  [0603]  19.56,108.46 270 top
R180  10k  [AXIAL-0.1]  22.1,108.46 270 top
R181  4.7k  [0603]  13.84,104.65 180 top
R182  100k  [0603]  17.65,104.65 180 top
R183  4.7k  [0603]  27.69,109.73 180 top
R184  4.7k  [0603]  27.69,107.19 180 top
R185  100k  [0603]  30.35,108.46 270 top
R186  10k  [0603]  37.85,108.46 270 top
R187  10k  [AXIAL-0.1]  40.39,108.46 270 top
R188  4.7k  [0603]  32.13,104.65 180 top
R189  100k  [0603]  35.94,104.65 180 top
R190  4.7k  [0603]  45.97,109.73 180 top
R191  4.7k  [0603]  45.97,107.19 180 top
R192  100k  [0603]  48.64,108.46 270 top
R193  10k  [0603]  56.13,108.46 270 top
R194  10k  [AXIAL-0.1]  58.67,108.46 270 top
R195  4.7k  [0603]  50.42,104.65 180 top
R196  100k  [0603]  54.23,104.65 180 top
R197  4.7k  [0603]  64.26,109.73 180 top
R198  4.7k  [0603]  64.26,107.19 180 top
R199  100k  [0603]  66.93,108.46 270 top
R200  10k  [0603]  74.42,108.46 270 top
R201  10k  [AXIAL-0.1]  76.96,108.46 270 top
R202  4.7k  [0603]  68.71,104.65 180 top
R203  100k  [0603]  72.52,104.65 180 top
R204  4.7k  [0603]  82.55,109.73 180 top
R205  4.7k  [0603]  82.55,107.19 180 top
R206  100k  [0603]  85.22,108.46 270 top
R207  10k  [0603]  92.71,108.46 270 top
R208  10k  [AXIAL-0.1]  95.25,108.46 270 top
R209  4.7k  [0603]  87,104.65 180 top
R210  100k  [0603]  90.81,104.65 180 top
U1  CCS811  [LGA10]  34.04,17.02 90 top
U2  CCS811  [LGA10]  15.75,17.02 90 top
U3  CCS811  [LGA10]  52.32,17.02 90 top
U4  CCS811  [LGA10]  70.61,17.02 90 top
U5  CCS811  [LGA10]  88.9,17.02 90 top
U6  CCS811  [LGA10]  15.75,35.31 90 top
U7  CCS811  [LGA10]  34.04,35.31 90 top
U8  CCS811  [LGA10]  52.32,35.31 90 top
U9  CCS811  [LGA10]  70.61,35.31 90 top
U10  CCS811  [LGA10]  88.9,35.31 90 top
U11  CCS811  [LGA10]  15.75,53.59 90 top
U12  CCS811  [LGA10]  34.04,53.59 90 top
U13  CCS811  [LGA10]  52.32,53.59 90 top
U14  CCS811  [LGA10]  70.61,53.59 90 top
U15  CCS811  [LGA10]  88.9,53.59 90 top
U16  CCS811  [LGA10]  15.75,71.88 90 top
U17  CCS811  [LGA10]  34.04,71.88 90 top
U18  CCS811  [LGA10]  52.32,71.88 90 top
U19  CCS811  [LGA10]  70.61,71.88 90 top
U20  CCS811  [LGA10]  88.9,71.88 90 top
U21  CCS811  [LGA10]  15.75,90.17 90 top
U22  CCS811  [LGA10]  34.04,90.17 90 top
U23  CCS811  [LGA10]  52.32,90.17 90 top
U24  CCS811  [LGA10]  70.61,90.17 90 top
U25  CCS811  [LGA10]  88.9,90.17 90 top
U26  CCS811  [LGA10]  15.75,108.46 90 top
U27  CCS811  [LGA10]  34.04,108.46 90 top
U28  CCS811  [LGA10]  52.32,108.46 90 top
U29  CCS811  [LGA10]  70.61,108.46 90 top
U30  CCS811  [LGA10]  88.9,108.46 90 top

## Library data of the parts
C1-C30 = SparkFun-Capacitors; PROD_ID: CAP-00868
E$1 = SparkFun-Retired
E$7 E$8 FD1-FD60 LOGO1-LOGO60 = SparkFun-Aesthetics
H1-H60 = SparkFun-Hardware
J1-J60 = SparkFun-Connectors
JP1-JP60 = SparkFun-Jumpers
R1 R5 R6 R11 R17 R21 R24 R28 R31 R35 R38 R42 R45 R49 R52 R56 R59 R63 R66 R70 R73 R77 R80 R84 R87 R91 R94 R98 R101 R105 R108 R112 R115 R119 R122 R126 R129 R133 R136 R140 R143 R147 R150 R154 R157 R161 R164 R168 R171 R175 R178 R182 R185 R189 R192 R196 R199 R203 R206 R210 = SparkFun-Resistors; PROD_ID: RES-07828
R2-R4 R9 R13-R16 R20 R22 R23 R27 R29 R30 R34 R36 R37 R41 R43 R44 R48 R50 R51 R55 R57 R58 R62 R64 R65 R69 R71 R72 R76 R78 R79 R83 R85 R86 R90 R92 R93 R97 R99 R100 R104 R106 R107 R111 R113 R114 R118 R120 R121 R125 R127 R128 R132 R134 R135 R139 R141 R142 R146 R148 R149 R153 R155 R156 R160 R162 R163 R167 R169 R170 R174 R176 R177 R181 R183 R184 R188 R190 R191 R195 R197 R198 R202 R204 R205 R209 = SparkFun-Resistors; PROD_ID: RES-07857
R7 R10 R18 R25 R32 R39 R46 R53 R60 R67 R74 R81 R88 R95 R102 R109 R116 R123 R130 R137 R144 R151 R158 R165 R172 R179 R186 R193 R200 R207 = SparkFun-Resistors; PROD_ID: RES-00824
R8 R12 R19 R26 R33 R40 R47 R54 R61 R68 R75 R82 R89 R96 R103 R110 R117 R124 R131 R138 R145 R152 R159 R166 R173 R180 R187 R194 R201 R208 = CCS811_Breakout_Temp; PROD_ID: N/A; SF_ID: SEN-00250
U1-U30 = CCS811_Breakout_Temp; PROD_ID: IC-13607

## Nets
3.3V: C2.1 J8.2 JP1.2 R2.2 R6.2 R10.2 U2.6
3.3V1: C1.1 J1.2 JP4.2 R5.2 R7.2 R9.2 U1.6
3.3V2: C3.1 J4.2 JP6.2 R17.2 R18.2 R20.2 U3.6
3.3V3: C4.1 J6.2 JP8.2 R24.2 R25.2 R27.2 U4.6
3.3V4: C5.1 J9.2 JP10.2 R31.2 R32.2 R34.2 U5.6
3.3V5: C6.1 J11.2 JP12.2 R38.2 R39.2 R41.2 U6.6
3.3V6: C7.1 J13.2 JP14.2 R45.2 R46.2 R48.2 U7.6
3.3V7: C8.1 J15.2 JP16.2 R52.2 R53.2 R55.2 U8.6
3.3V8: C9.1 J17.2 JP18.2 R59.2 R60.2 R62.2 U9.6
3.3V9: C10.1 J19.2 JP20.2 R66.2 R67.2 R69.2 U10.6
3.3V10: C11.1 J21.2 JP22.2 R73.2 R74.2 R76.2 U11.6
3.3V11: C12.1 J23.2 JP24.2 R80.2 R81.2 R83.2 U12.6
3.3V12: C13.1 J25.2 JP26.2 R87.2 R88.2 R90.2 U13.6
3.3V13: C14.1 J27.2 JP28.2 R94.2 R95.2 R97.2 U14.6
3.3V14: C15.1 J29.2 JP30.2 R101.2 R102.2 R104.2 U15.6
3.3V15: C16.1 J31.2 JP32.2 R108.2 R109.2 R111.2 U16.6
3.3V16: C17.1 J33.2 JP34.2 R115.2 R116.2 R118.2 U17.6
3.3V17: C18.1 J35.2 JP36.2 R122.2 R123.2 R125.2 U18.6
3.3V18: C19.1 J37.2 JP38.2 R129.2 R130.2 R132.2 U19.6
3.3V19: C20.1 J39.2 JP40.2 R136.2 R137.2 R139.2 U20.6
3.3V20: C21.1 J41.2 JP42.2 R143.2 R144.2 R146.2 U21.6
3.3V21: C22.1 J43.2 JP44.2 R150.2 R151.2 R153.2 U22.6
3.3V22: C23.1 J45.2 JP46.2 R157.2 R158.2 R160.2 U23.6
3.3V23: C24.1 J47.2 JP48.2 R164.2 R165.2 R167.2 U24.6
3.3V24: C25.1 J49.2 JP50.2 R171.2 R172.2 R174.2 U25.6
3.3V25: C26.1 J51.2 JP52.2 R178.2 R179.2 R181.2 U26.6
3.3V26: C27.1 J53.2 JP54.2 R185.2 R186.2 R188.2 U27.6
3.3V27: C28.1 J55.2 JP56.2 R192.2 R193.2 R195.2 U28.6
3.3V28: C29.1 J57.2 JP58.2 R199.2 R200.2 R202.2 U29.6
3.3V29: C30.1 J59.2 JP60.2 R206.2 R207.2 R209.2 U30.6
!INT: J2.2 U2.3
!INT1: J3.2 U1.3
!INT2: J5.2 U3.3
!INT3: J7.2 U4.3
!INT4: J10.2 U5.3
!INT5: J12.2 U6.3
!INT6: J14.2 U7.3
!INT7: J16.2 U8.3
!INT8: J18.2 U9.3
!INT9: J20.2 U10.3
!INT10: J22.2 U11.3
!INT11: J24.2 U12.3
!INT12: J26.2 U13.3
!INT13: J28.2 U14.3
!INT14: J30.2 U15.3
!INT15: J32.2 U16.3
!INT16: J34.2 U17.3
!INT17: J36.2 U18.3
!INT18: J38.2 U19.3
!INT19: J40.2 U20.3
!INT20: J42.2 U21.3
!INT21: J44.2 U22.3
!INT22: J46.2 U23.3
!INT23: J48.2 U24.3
!INT24: J50.2 U25.3
!INT25: J52.2 U26.3
!INT26: J54.2 U27.3
!INT27: J56.2 U28.3
!INT28: J58.2 U29.3
!INT29: J60.2 U30.3
!RST: J2.3 R2.1 U2.2
!RST1: J3.3 R9.1 U1.2
!RST2: J5.3 R20.1 U3.2
!RST3: J7.3 R27.1 U4.2
!RST4: J10.3 R34.1 U5.2
!RST5: J12.3 R41.1 U6.2
!RST6: J14.3 R48.1 U7.2
!RST7: J16.3 R55.1 U8.2
!RST8: J18.3 R62.1 U9.2
!RST9: J20.3 R69.1 U10.2
!RST10: J22.3 R76.1 U11.2
!RST11: J24.3 R83.1 U12.2
!RST12: J26.3 R90.1 U13.2
!RST13: J28.3 R97.1 U14.2
!RST14: J30.3 R104.1 U15.2
!RST15: J32.3 R111.1 U16.2
!RST16: J34.3 R118.1 U17.2
!RST17: J36.3 R125.1 U18.2
!RST18: J38.3 R132.1 U19.2
!RST19: J40.3 R139.1 U20.2
!RST20: J42.3 R146.1 U21.2
!RST21: J44.3 R153.1 U22.2
!RST22: J46.3 R160.1 U23.2
!RST23: J48.3 R167.1 U24.2
!RST24: J50.3 R174.1 U25.2
!RST25: J52.3 R181.1 U26.2
!RST26: J54.3 R188.1 U27.2
!RST27: J56.3 R195.1 U28.2
!RST28: J58.3 R202.1 U29.2
!RST29: J60.3 R209.1 U30.2
!WAKE: J2.1 R1.2 U2.7
!WAKE1: J3.1 R11.2 U1.7
!WAKE2: J5.1 R21.2 U3.7
!WAKE3: J7.1 R28.2 U4.7
!WAKE4: J10.1 R35.2 U5.7
!WAKE5: J12.1 R42.2 U6.7
!WAKE6: J14.1 R49.2 U7.7
!WAKE7: J16.1 R56.2 U8.7
!WAKE8: J18.1 R63.2 U9.7
!WAKE9: J20.1 R70.2 U10.7
!WAKE10: J22.1 R77.2 U11.7
!WAKE11: J24.1 R84.2 U12.7
!WAKE12: J26.1 R91.2 U13.7
!WAKE13: J28.1 R98.2 U14.7
!WAKE14: J30.1 R105.2 U15.7
!WAKE15: J32.1 R112.2 U16.7
!WAKE16: J34.1 R119.2 U17.7
!WAKE17: J36.1 R126.2 U18.7
!WAKE18: J38.1 R133.2 U19.7
!WAKE19: J40.1 R140.2 U20.7
!WAKE20: J42.1 R147.2 U21.7
!WAKE21: J44.1 R154.2 U22.7
!WAKE22: J46.1 R161.2 U23.7
!WAKE23: J48.1 R168.2 U24.7
!WAKE24: J50.1 R175.2 U25.7
!WAKE25: J52.1 R182.2 U26.7
!WAKE26: J54.1 R189.2 U27.7
!WAKE27: J56.1 R196.2 U28.7
!WAKE28: J58.1 R203.2 U29.7
!WAKE29: J60.1 R210.2 U30.7
AUX: R10.1 R12.P$1 U2.8
AUX1: R7.1 R8.P$1 U1.8
AUX2: R18.1 R19.P$1 U3.8
AUX3: R25.1 R26.P$1 U4.8
AUX4: R32.1 R33.P$1 U5.8
AUX5: R39.1 R40.P$1 U6.8
AUX6: R46.1 R47.P$1 U7.8
AUX7: R53.1 R54.P$1 U8.8
AUX8: R60.1 R61.P$1 U9.8
AUX9: R67.1 R68.P$1 U10.8
AUX10: R74.1 R75.P$1 U11.8
AUX11: R81.1 R82.P$1 U12.8
AUX12: R88.1 R89.P$1 U13.8
AUX13: R95.1 R96.P$1 U14.8
AUX14: R102.1 R103.P$1 U15.8
AUX15: R109.1 R110.P$1 U16.8
AUX16: R116.1 R117.P$1 U17.8
AUX17: R123.1 R124.P$1 U18.8
AUX18: R130.1 R131.P$1 U19.8
AUX19: R137.1 R138.P$1 U20.8
AUX20: R144.1 R145.P$1 U21.8
AUX21: R151.1 R152.P$1 U22.8
AUX22: R158.1 R159.P$1 U23.8
AUX23: R165.1 R166.P$1 U24.8
AUX24: R172.1 R173.P$1 U25.8
AUX25: R179.1 R180.P$1 U26.8
AUX26: R186.1 R187.P$1 U27.8
AUX27: R193.1 R194.P$1 U28.8
AUX28: R200.1 R201.P$1 U29.8
AUX29: R207.1 R208.P$1 U30.8
CCS811_ADDR: JP2.2 R6.1 U2.1
CCS811_ADDR1: JP3.2 R5.1 U1.1
CCS811_ADDR2: JP5.2 R17.1 U3.1
CCS811_ADDR3: JP7.2 R24.1 U4.1
CCS811_ADDR4: JP9.2 R31.1 U5.1
CCS811_ADDR5: JP11.2 R38.1 U6.1
CCS811_ADDR6: JP13.2 R45.1 U7.1
CCS811_ADDR7: JP15.2 R52.1 U8.1
CCS811_ADDR8: JP17.2 R59.1 U9.1
CCS811_ADDR9: JP19.2 R66.1 U10.1
CCS811_ADDR10: JP21.2 R73.1 U11.1
CCS811_ADDR11: JP23.2 R80.1 U12.1
CCS811_ADDR12: JP25.2 R87.1 U13.1
CCS811_ADDR13: JP27.2 R94.1 U14.1
CCS811_ADDR14: JP29.2 R101.1 U15.1
CCS811_ADDR15: JP31.2 R108.1 U16.1
CCS811_ADDR16: JP33.2 R115.1 U17.1
CCS811_ADDR17: JP35.2 R122.1 U18.1
CCS811_ADDR18: JP37.2 R129.1 U19.1
CCS811_ADDR19: JP39.2 R136.1 U20.1
CCS811_ADDR20: JP41.2 R143.1 U21.1
CCS811_ADDR21: JP43.2 R150.1 U22.1
CCS811_ADDR22: JP45.2 R157.1 U23.1
CCS811_ADDR23: JP47.2 R164.1 U24.1
CCS811_ADDR24: JP49.2 R171.1 U25.1
CCS811_ADDR25: JP51.2 R178.1 U26.1
CCS811_ADDR26: JP53.2 R185.1 U27.1
CCS811_ADDR27: JP55.2 R192.1 U28.1
CCS811_ADDR28: JP57.2 R199.1 U29.1
CCS811_ADDR29: JP59.2 R206.1 U30.1
GND: C2.2 J8.1 JP2.1 R1.1 U2.EP
GND1: C1.2 J1.1 JP3.1 R11.1 U1.EP
GND2: C3.2 J4.1 JP5.1 R21.1 U3.EP
GND3: C4.2 J6.1 JP7.1 R28.1 U4.EP
GND4: C5.2 J9.1 JP9.1 R35.1 U5.EP
GND5: C6.2 J11.1 JP11.1 R42.1 U6.EP
GND6: C7.2 J13.1 JP13.1 R49.1 U7.EP
GND7: C8.2 J15.1 JP15.1 R56.1 U8.EP
GND8: C9.2 J17.1 JP17.1 R63.1 U9.EP
GND9: C10.2 J19.1 JP19.1 R70.1 U10.EP
GND10: C11.2 J21.1 JP21.1 R77.1 U11.EP
GND11: C12.2 J23.1 JP23.1 R84.1 U12.EP
GND12: C13.2 J25.1 JP25.1 R91.1 U13.EP
GND13: C14.2 J27.1 JP27.1 R98.1 U14.EP
GND14: C15.2 J29.1 JP29.1 R105.1 U15.EP
GND15: C16.2 J31.1 JP31.1 R112.1 U16.EP
GND16: C17.2 J33.1 JP33.1 R119.1 U17.EP
GND17: C18.2 J35.1 JP35.1 R126.1 U18.EP
GND18: C19.2 J37.1 JP37.1 R133.1 U19.EP
GND19: C20.2 J39.1 JP39.1 R140.1 U20.EP
GND20: C21.2 J41.1 JP41.1 R147.1 U21.EP
GND21: C22.2 J43.1 JP43.1 R154.1 U22.EP
GND22: C23.2 J45.1 JP45.1 R161.1 U23.EP
GND23: C24.2 J47.1 JP47.1 R168.1 U24.EP
GND24: C25.2 J49.1 JP49.1 R175.1 U25.EP
GND25: C26.2 J51.1 JP51.1 R182.1 U26.EP
GND26: C27.2 J53.1 JP53.1 R189.1 U27.EP
GND27: C28.2 J55.1 JP55.1 R196.1 U28.EP
GND28: C29.2 J57.1 JP57.1 R203.1 U29.EP
GND29: C30.2 J59.1 JP59.1 R210.1 U30.EP
N$1: JP4.3 R3.2
N$2: JP4.1 R4.2
N$3: JP6.3 R15.2
N$4: JP1.3 R13.2
N$5: JP1.1 R14.2
N$6: JP6.1 R16.2
N$7: JP8.3 R22.2
N$8: JP8.1 R23.2
N$9: JP10.3 R29.2
N$10: JP10.1 R30.2
N$11: JP12.3 R36.2
N$12: JP12.1 R37.2
N$13: JP14.3 R43.2
N$14: JP14.1 R44.2
N$15: JP16.3 R50.2
N$16: JP16.1 R51.2
N$17: JP18.3 R57.2
N$18: JP18.1 R58.2
N$19: JP20.3 R64.2
N$20: JP20.1 R65.2
N$21: JP22.3 R71.2
N$22: JP22.1 R72.2
N$23: JP24.3 R78.2
N$24: JP24.1 R79.2
N$25: JP26.3 R85.2
N$26: JP26.1 R86.2
N$27: JP28.3 R92.2
N$28: JP28.1 R93.2
N$29: JP30.3 R99.2
N$30: JP30.1 R100.2
N$31: JP32.3 R106.2
N$32: JP32.1 R107.2
N$33: JP34.3 R113.2
N$34: JP34.1 R114.2
N$35: JP36.3 R120.2
N$36: JP36.1 R121.2
N$37: JP38.3 R127.2
N$38: JP38.1 R128.2
N$39: JP40.3 R134.2
N$40: JP40.1 R135.2
N$41: JP42.3 R141.2
N$42: JP42.1 R142.2
N$43: JP44.3 R148.2
N$44: JP44.1 R149.2
N$45: JP46.3 R155.2
N$46: JP46.1 R156.2
N$47: JP48.3 R162.2
N$48: JP48.1 R163.2
N$49: JP50.3 R169.2
N$50: JP50.1 R170.2
N$51: JP52.3 R176.2
N$52: JP52.1 R177.2
N$53: JP54.3 R183.2
N$54: JP54.1 R184.2
N$55: JP56.3 R190.2
N$56: JP56.1 R191.2
N$57: JP58.3 R197.2
N$58: JP58.1 R198.2
N$59: JP60.3 R204.2
N$60: JP60.1 R205.2
NTC_SENSE: R12.P$2 U2.4 U2.5
NTC_SENSE1: R8.P$2 U1.4 U1.5
NTC_SENSE2: R19.P$2 U3.4 U3.5
NTC_SENSE3: R26.P$2 U4.4 U4.5
NTC_SENSE4: R33.P$2 U5.4 U5.5
NTC_SENSE5: R40.P$2 U6.4 U6.5
NTC_SENSE6: R47.P$2 U7.4 U7.5
NTC_SENSE7: R54.P$2 U8.4 U8.5
NTC_SENSE8: R61.P$2 U9.4 U9.5
NTC_SENSE9: R68.P$2 U10.4 U10.5
NTC_SENSE10: R75.P$2 U11.4 U11.5
NTC_SENSE11: R82.P$2 U12.4 U12.5
NTC_SENSE12: R89.P$2 U13.4 U13.5
NTC_SENSE13: R96.P$2 U14.4 U14.5
NTC_SENSE14: R103.P$2 U15.4 U15.5
NTC_SENSE15: R110.P$2 U16.4 U16.5
NTC_SENSE16: R117.P$2 U17.4 U17.5
NTC_SENSE17: R124.P$2 U18.4 U18.5
NTC_SENSE18: R131.P$2 U19.4 U19.5
NTC_SENSE19: R138.P$2 U20.4 U20.5
NTC_SENSE20: R145.P$2 U21.4 U21.5
NTC_SENSE21: R152.P$2 U22.4 U22.5
NTC_SENSE22: R159.P$2 U23.4 U23.5
NTC_SENSE23: R166.P$2 U24.4 U24.5
NTC_SENSE24: R173.P$2 U25.4 U25.5
NTC_SENSE25: R180.P$2 U26.4 U26.5
NTC_SENSE26: R187.P$2 U27.4 U27.5
NTC_SENSE27: R194.P$2 U28.4 U28.5
NTC_SENSE28: R201.P$2 U29.4 U29.5
NTC_SENSE29: R208.P$2 U30.4 U30.5
SCL: J8.4 R14.1 U2.10
SCL1: J1.4 R4.1 U1.10
SCL2: J4.4 R16.1 U3.10
SCL3: J6.4 R23.1 U4.10
SCL4: J9.4 R30.1 U5.10
SCL5: J11.4 R37.1 U6.10
SCL6: J13.4 R44.1 U7.10
SCL7: J15.4 R51.1 U8.10
SCL8: J17.4 R58.1 U9.10
SCL9: J19.4 R65.1 U10.10
SCL10: J21.4 R72.1 U11.10
SCL11: J23.4 R79.1 U12.10
SCL12: J25.4 R86.1 U13.10
SCL13: J27.4 R93.1 U14.10
SCL14: J29.4 R100.1 U15.10
SCL15: J31.4 R107.1 U16.10
SCL16: J33.4 R114.1 U17.10
SCL17: J35.4 R121.1 U18.10
SCL18: J37.4 R128.1 U19.10
SCL19: J39.4 R135.1 U20.10
SCL20: J41.4 R142.1 U21.10
SCL21: J43.4 R149.1 U22.10
SCL22: J45.4 R156.1 U23.10
SCL23: J47.4 R163.1 U24.10
SCL24: J49.4 R170.1 U25.10
SCL25: J51.4 R177.1 U26.10
SCL26: J53.4 R184.1 U27.10
SCL27: J55.4 R191.1 U28.10
SCL28: J57.4 R198.1 U29.10
SCL29: J59.4 R205.1 U30.10
SDA: J8.3 R13.1 U2.9
SDA1: J1.3 R3.1 U1.9
SDA2: J4.3 R15.1 U3.9
SDA3: J6.3 R22.1 U4.9
SDA4: J9.3 R29.1 U5.9
SDA5: J11.3 R36.1 U6.9
SDA6: J13.3 R43.1 U7.9
SDA7: J15.3 R50.1 U8.9
SDA8: J17.3 R57.1 U9.9
SDA9: J19.3 R64.1 U10.9
SDA10: J21.3 R71.1 U11.9
SDA11: J23.3 R78.1 U12.9
SDA12: J25.3 R85.1 U13.9
SDA13: J27.3 R92.1 U14.9
SDA14: J29.3 R99.1 U15.9
SDA15: J31.3 R106.1 U16.9
SDA16: J33.3 R113.1 U17.9
SDA17: J35.3 R120.1 U18.9
SDA18: J37.3 R127.1 U19.9
SDA19: J39.3 R134.1 U20.9
SDA20: J41.3 R141.1 U21.9
SDA21: J43.3 R148.1 U22.9
SDA22: J45.3 R155.1 U23.9
SDA23: J47.3 R162.1 U24.9
SDA24: J49.3 R169.1 U25.9
SDA25: J51.3 R176.1 U26.9
SDA26: J53.3 R183.1 U27.9
SDA27: J55.3 R190.1 U28.9
SDA28: J57.3 R197.1 U29.9
SDA29: J59.3 R204.1 U30.9

## Tracks (layer width: path | path; a pad name or v marks a point on that pad's centre or on a via)
3.3V  (via drill 0.38)
  Top 0.178: J8.2 20.83,13.08 19.56,14.35 R10.2 18.88,16.17 18.67,16.38 18.67,18.16 | U2.6 18.63,18.12 18.67,18.16 | v11.18,19.94 13.08,21.84 15.88,21.84 16.6,21.12 C2.1 17.91,20.19 18.67,19.43 18.67,18.16 | R6.2 v12.06,14.48 12.06,13.59 12.45,13.21 R2.2
  Bottom 0.178: v11.18,19.94 8.76,19.94 8.38,20.32 7.62,20.32 7.37,20.07 7.37,17.02 | 7.37,17.02 7.37,13.97 8.13,13.21 9.4,13.21 10.67,14.48 v12.06,14.48 | JP1.2 7.37,17.02
3.3V1  (via drill 0.38)
  Top 0.178: J1.2 39.12,13.08 37.85,14.35 R7.2 37.17,16.17 36.96,16.38 36.96,18.16 | U1.6 36.91,18.12 36.96,18.16 | v29.46,19.94 31.37,21.84 34.16,21.84 34.89,21.12 C1.1 36.2,20.19 36.96,19.43 36.96,18.16 | R5.2 v30.35,14.48 30.35,13.59 30.73,13.21 R9.2
  Bottom 0.178: v29.46,19.94 27.05,19.94 26.67,20.32 25.91,20.32 25.65,20.07 25.65,17.02 | 25.65,17.02 25.65,13.97 26.42,13.21 27.69,13.21 28.96,14.48 v30.35,14.48 | JP4.2 25.65,17.02
3.3V2  (via drill 0.38)
  Top 0.178: J4.2 57.4,13.08 56.13,14.35 R18.2 55.46,16.17 55.24,16.38 55.24,18.16 | U3.6 55.2,18.12 55.24,18.16 | v47.75,19.94 49.66,21.84 52.45,21.84 53.17,21.12 C3.1 54.48,20.19 55.24,19.43 55.24,18.16 | R17.2 v48.64,14.48 48.64,13.59 49.02,13.21 R20.2
  Bottom 0.178: v47.75,19.94 45.34,19.94 44.96,20.32 44.2,20.32 43.94,20.07 43.94,17.02 | 43.94,17.02 43.94,13.97 44.7,13.21 45.97,13.21 47.24,14.48 v48.64,14.48 | JP6.2 43.94,17.02
3.3V3  (via drill 0.38)
  Top 0.178: J6.2 75.69,13.08 74.42,14.35 R25.2 73.75,16.17 73.53,16.38 73.53,18.16 | U4.6 73.49,18.12 73.53,18.16 | v66.04,19.94 67.94,21.84 70.74,21.84 71.46,21.12 C4.1 72.77,20.19 73.53,19.43 73.53,18.16 | R24.2 v66.93,14.48 66.93,13.59 67.31,13.21 R27.2
  Bottom 0.178: v66.04,19.94 63.63,19.94 63.25,20.32 62.48,20.32 62.23,20.07 62.23,17.02 | 62.23,17.02 62.23,13.97 62.99,13.21 64.26,13.21 65.53,14.48 v66.93,14.48 | JP8.2 62.23,17.02
3.3V4  (via drill 0.38)
  Top 0.178: J9.2 93.98,13.08 92.71,14.35 R32.2 92.04,16.17 91.82,16.38 91.82,18.16 | U5.6 91.78,18.12 91.82,18.16 | v84.33,19.94 86.23,21.84 89.03,21.84 89.75,21.12 C5.1 91.06,20.19 91.82,19.43 91.82,18.16 | R31.2 v85.22,14.48 85.22,13.59 85.6,13.21 R34.2
  Bottom 0.178: v84.33,19.94 81.92,19.94 81.53,20.32 80.77,20.32 80.52,20.07 80.52,17.02 | 80.52,17.02 80.52,13.97 81.28,13.21 82.55,13.21 83.82,14.48 v85.22,14.48 | JP10.2 80.52,17.02
3.3V5  (via drill 0.38)
  Top 0.178: J11.2 20.83,31.37 19.56,32.64 R39.2 18.88,34.46 18.67,34.67 18.67,36.45 | U6.6 18.63,36.41 18.67,36.45 | v11.18,38.23 13.08,40.13 15.88,40.13 16.6,39.41 C6.1 17.91,38.48 18.67,37.72 18.67,36.45 | R38.2 v12.06,32.77 12.06,31.88 12.45,31.5 R41.2
  Bottom 0.178: v11.18,38.23 8.76,38.23 8.38,38.61 7.62,38.61 7.37,38.35 7.37,35.31 | 7.37,35.31 7.37,32.26 8.13,31.5 9.4,31.5 10.67,32.77 v12.06,32.77 | JP12.2 7.37,35.31
3.3V6  (via drill 0.38)
  Top 0.178: J13.2 39.12,31.37 37.85,32.64 R46.2 37.17,34.46 36.96,34.67 36.96,36.45 | U7.6 36.91,36.41 36.96,36.45 | v29.46,38.23 31.37,40.13 34.16,40.13 34.89,39.41 C7.1 36.2,38.48 36.96,37.72 36.96,36.45 | R45.2 v30.35,32.77 30.35,31.88 30.73,31.5 R48.2
  Bottom 0.178: v29.46,38.23 27.05,38.23 26.67,38.61 25.91,38.61 25.65,38.35 25.65,35.31 | 25.65,35.31 25.65,32.26 26.42,31.5 27.69,31.5 28.96,32.77 v30.35,32.77 | JP14.2 25.65,35.31
3.3V7  (via drill 0.38)
  Top 0.178: J15.2 57.4,31.37 56.13,32.64 R53.2 55.46,34.46 55.24,34.67 55.24,36.45 | U8.6 55.2,36.41 55.24,36.45 | v47.75,38.23 49.66,40.13 52.45,40.13 53.17,39.41 C8.1 54.48,38.48 55.24,37.72 55.24,36.45 | R52.2 v48.64,32.77 48.64,31.88 49.02,31.5 R55.2
  Bottom 0.178: v47.75,38.23 45.34,38.23 44.96,38.61 44.2,38.61 43.94,38.35 43.94,35.31 | 43.94,35.31 43.94,32.26 44.7,31.5 45.97,31.5 47.24,32.77 v48.64,32.77 | JP16.2 43.94,35.31
3.3V8  (via drill 0.38)
  Top 0.178: J17.2 75.69,31.37 74.42,32.64 R60.2 73.75,34.46 73.53,34.67 73.53,36.45 | U9.6 73.49,36.41 73.53,36.45 | v66.04,38.23 67.94,40.13 70.74,40.13 71.46,39.41 C9.1 72.77,38.48 73.53,37.72 73.53,36.45 | R59.2 v66.93,32.77 66.93,31.88 67.31,31.5 R62.2
  Bottom 0.178: v66.04,38.23 63.63,38.23 63.25,38.61 62.48,38.61 62.23,38.35 62.23,35.31 | 62.23,35.31 62.23,32.26 62.99,31.5 64.26,31.5 65.53,32.77 v66.93,32.77 | JP18.2 62.23,35.31
3.3V9  (via drill 0.38)
  Top 0.178: J19.2 93.98,31.37 92.71,32.64 R67.2 92.04,34.46 91.82,34.67 91.82,36.45 | U10.6 91.78,36.41 91.82,36.45 | v84.33,38.23 86.23,40.13 89.03,40.13 89.75,39.41 C10.1 91.06,38.48 91.82,37.72 91.82,36.45 | R66.2 v85.22,32.77 85.22,31.88 85.6,31.5 R69.2
  Bottom 0.178: v84.33,38.23 81.92,38.23 81.53,38.61 80.77,38.61 80.52,38.35 80.52,35.31 | 80.52,35.31 80.52,32.26 81.28,31.5 82.55,31.5 83.82,32.77 v85.22,32.77 | JP20.2 80.52,35.31
3.3V10  (via drill 0.38)
  Top 0.178: J21.2 20.83,49.66 19.56,50.93 R74.2 18.88,52.74 18.67,52.96 18.67,54.74 | U11.6 18.63,54.69 18.67,54.74 | v11.18,56.52 13.08,58.42 15.88,58.42 16.6,57.7 C11.1 17.91,56.77 18.67,56.01 18.67,54.74 | R73.2 v12.06,51.05 12.06,50.16 12.45,49.78 R76.2
  Bottom 0.178: v11.18,56.52 8.76,56.52 8.38,56.9 7.62,56.9 7.37,56.64 7.37,53.59 | 7.37,53.59 7.37,50.55 8.13,49.78 9.4,49.78 10.67,51.05 v12.06,51.05 | JP22.2 7.37,53.59
3.3V11  (via drill 0.38)
  Top 0.178: J23.2 39.12,49.66 37.85,50.93 R81.2 37.17,52.74 36.96,52.96 36.96,54.74 | U12.6 36.91,54.69 36.96,54.74 | v29.46,56.52 31.37,58.42 34.16,58.42 34.89,57.7 C12.1 36.2,56.77 36.96,56.01 36.96,54.74 | R80.2 v30.35,51.05 30.35,50.16 30.73,49.78 R83.2
  Bottom 0.178: v29.46,56.52 27.05,56.52 26.67,56.9 25.91,56.9 25.65,56.64 25.65,53.59 | 25.65,53.59 25.65,50.55 26.42,49.78 27.69,49.78 28.96,51.05 v30.35,51.05 | JP24.2 25.65,53.59
3.3V12  (via drill 0.38)
  Top 0.178: J25.2 57.4,49.66 56.13,50.93 R88.2 55.46,52.74 55.24,52.96 55.24,54.74 | U13.6 55.2,54.69 55.24,54.74 | v47.75,56.52 49.66,58.42 52.45,58.42 53.17,57.7 C13.1 54.48,56.77 55.24,56.01 55.24,54.74 | R87.2 v48.64,51.05 48.64,50.16 49.02,49.78 R90.2
  Bottom 0.178: v47.75,56.52 45.34,56.52 44.96,56.9 44.2,56.9 43.94,56.64 43.94,53.59 | 43.94,53.59 43.94,50.55 44.7,49.78 45.97,49.78 47.24,51.05 v48.64,51.05 | JP26.2 43.94,53.59
3.3V13  (via drill 0.38)
  Top 0.178: J27.2 75.69,49.66 74.42,50.93 R95.2 73.75,52.74 73.53,52.96 73.53,54.74 | U14.6 73.49,54.69 73.53,54.74 | v66.04,56.52 67.94,58.42 70.74,58.42 71.46,57.7 C14.1 72.77,56.77 73.53,56.01 73.53,54.74 | R94.2 v66.93,51.05 66.93,50.16 67.31,49.78 R97.2
  Bottom 0.178: v66.04,56.52 63.63,56.52 63.25,56.9 62.48,56.9 62.23,56.64 62.23,53.59 | 62.23,53.59 62.23,50.55 62.99,49.78 64.26,49.78 65.53,51.05 v66.93,51.05 | JP28.2 62.23,53.59
3.3V14  (via drill 0.38)
  Top 0.178: J29.2 93.98,49.66 92.71,50.93 R102.2 92.04,52.74 91.82,52.96 91.82,54.74 | U15.6 91.78,54.69 91.82,54.74 | v84.33,56.52 86.23,58.42 89.03,58.42 89.75,57.7 C15.1 91.06,56.77 91.82,56.01 91.82,54.74 | R101.2 v85.22,51.05 85.22,50.16 85.6,49.78 R104.2
  Bottom 0.178: v84.33,56.52 81.92,56.52 81.53,56.9 80.77,56.9 80.52,56.64 80.52,53.59 | 80.52,53.59 80.52,50.55 81.28,49.78 82.55,49.78 83.82,51.05 v85.22,51.05 | JP30.2 80.52,53.59
3.3V15  (via drill 0.38)
  Top 0.178: J31.2 20.83,67.94 19.56,69.22 R109.2 18.88,71.03 18.67,71.25 18.67,73.03 | U16.6 18.63,72.98 18.67,73.03 | v11.18,74.8 13.08,76.71 15.88,76.71 16.6,75.98 C16.1 17.91,75.06 18.67,74.3 18.67,73.03 | R108.2 v12.06,69.34 12.06,68.45 12.45,68.07 R111.2
  Bottom 0.178: v11.18,74.8 8.76,74.8 8.38,75.18 7.62,75.18 7.37,74.93 7.37,71.88 | 7.37,71.88 7.37,68.83 8.13,68.07 9.4,68.07 10.67,69.34 v12.06,69.34 | JP32.2 7.37,71.88
3.3V16  (via drill 0.38)
  Top 0.178: J33.2 39.12,67.94 37.85,69.22 R116.2 37.17,71.03 36.96,71.25 36.96,73.03 | U17.6 36.91,72.98 36.96,73.03 | v29.46,74.8 31.37,76.71 34.16,76.71 34.89,75.98 C17.1 36.2,75.06 36.96,74.3 36.96,73.03 | R115.2 v30.35,69.34 30.35,68.45 30.73,68.07 R118.2
  Bottom 0.178: v29.46,74.8 27.05,74.8 26.67,75.18 25.91,75.18 25.65,74.93 25.65,71.88 | 25.65,71.88 25.65,68.83 26.42,68.07 27.69,68.07 28.96,69.34 v30.35,69.34 | JP34.2 25.65,71.88
3.3V17  (via drill 0.38)
  Top 0.178: J35.2 57.4,67.94 56.13,69.22 R123.2 55.46,71.03 55.24,71.25 55.24,73.03 | U18.6 55.2,72.98 55.24,73.03 | v47.75,74.8 49.66,76.71 52.45,76.71 53.17,75.98 C18.1 54.48,75.06 55.24,74.3 55.24,73.03 | R122.2 v48.64,69.34 48.64,68.45 49.02,68.07 R125.2
  Bottom 0.178: v47.75,74.8 45.34,74.8 44.96,75.18 44.2,75.18 43.94,74.93 43.94,71.88 | 43.94,71.88 43.94,68.83 44.7,68.07 45.97,68.07 47.24,69.34 v48.64,69.34 | JP36.2 43.94,71.88
3.3V18  (via drill 0.38)
  Top 0.178: J37.2 75.69,67.94 74.42,69.22 R130.2 73.75,71.03 73.53,71.25 73.53,73.03 | U19.6 73.49,72.98 73.53,73.03 | v66.04,74.8 67.94,76.71 70.74,76.71 71.46,75.98 C19.1 72.77,75.06 73.53,74.3 73.53,73.03 | R129.2 v66.93,69.34 66.93,68.45 67.31,68.07 R132.2
  Bottom 0.178: v66.04,74.8 63.63,74.8 63.25,75.18 62.48,75.18 62.23,74.93 62.23,71.88 | 62.23,71.88 62.23,68.83 62.99,68.07 64.26,68.07 65.53,69.34 v66.93,69.34 | JP38.2 62.23,71.88
3.3V19  (via drill 0.38)
  Top 0.178: J39.2 93.98,67.94 92.71,69.22 R137.2 92.04,71.03 91.82,71.25 91.82,73.03 | U20.6 91.78,72.98 91.82,73.03 | v84.33,74.8 86.23,76.71 89.03,76.71 89.75,75.98 C20.1 91.06,75.06 91.82,74.3 91.82,73.03 | R136.2 v85.22,69.34 85.22,68.45 85.6,68.07 R139.2
  Bottom 0.178: v84.33,74.8 81.92,74.8 81.53,75.18 80.77,75.18 80.52,74.93 80.52,71.88 | 80.52,71.88 80.52,68.83 81.28,68.07 82.55,68.07 83.82,69.34 v85.22,69.34 | JP40.2 80.52,71.88
3.3V20  (via drill 0.38)
  Top 0.178: J41.2 20.83,86.23 19.56,87.5 R144.2 18.88,89.32 18.67,89.53 18.67,91.31 | U21.6 18.63,91.27 18.67,91.31 | v11.18,93.09 13.08,95 15.88,95 16.6,94.27 C21.1 17.91,93.34 18.67,92.58 18.67,91.31 | R143.2 v12.06,87.63 12.06,86.74 12.45,86.36 R146.2
  Bottom 0.178: v11.18,93.09 8.76,93.09 8.38,93.47 7.62,93.47 7.37,93.22 7.37,90.17 | 7.37,90.17 7.37,87.12 8.13,86.36 9.4,86.36 10.67,87.63 v12.06,87.63 | JP42.2 7.37,90.17
3.3V21  (via drill 0.38)